# Altium PCB PCB_24V_PWR.PcbDoc
Units mm, origin at the board's own origin, x right, y up, seen from the top; angles counter-clockwise.
Board outline 41 x 35 mm, 2 copper layers (Top Layer, Bottom Layer), stack 1.67 mm thick; 20 components, 38 nets, 78 pads, 25 vias.
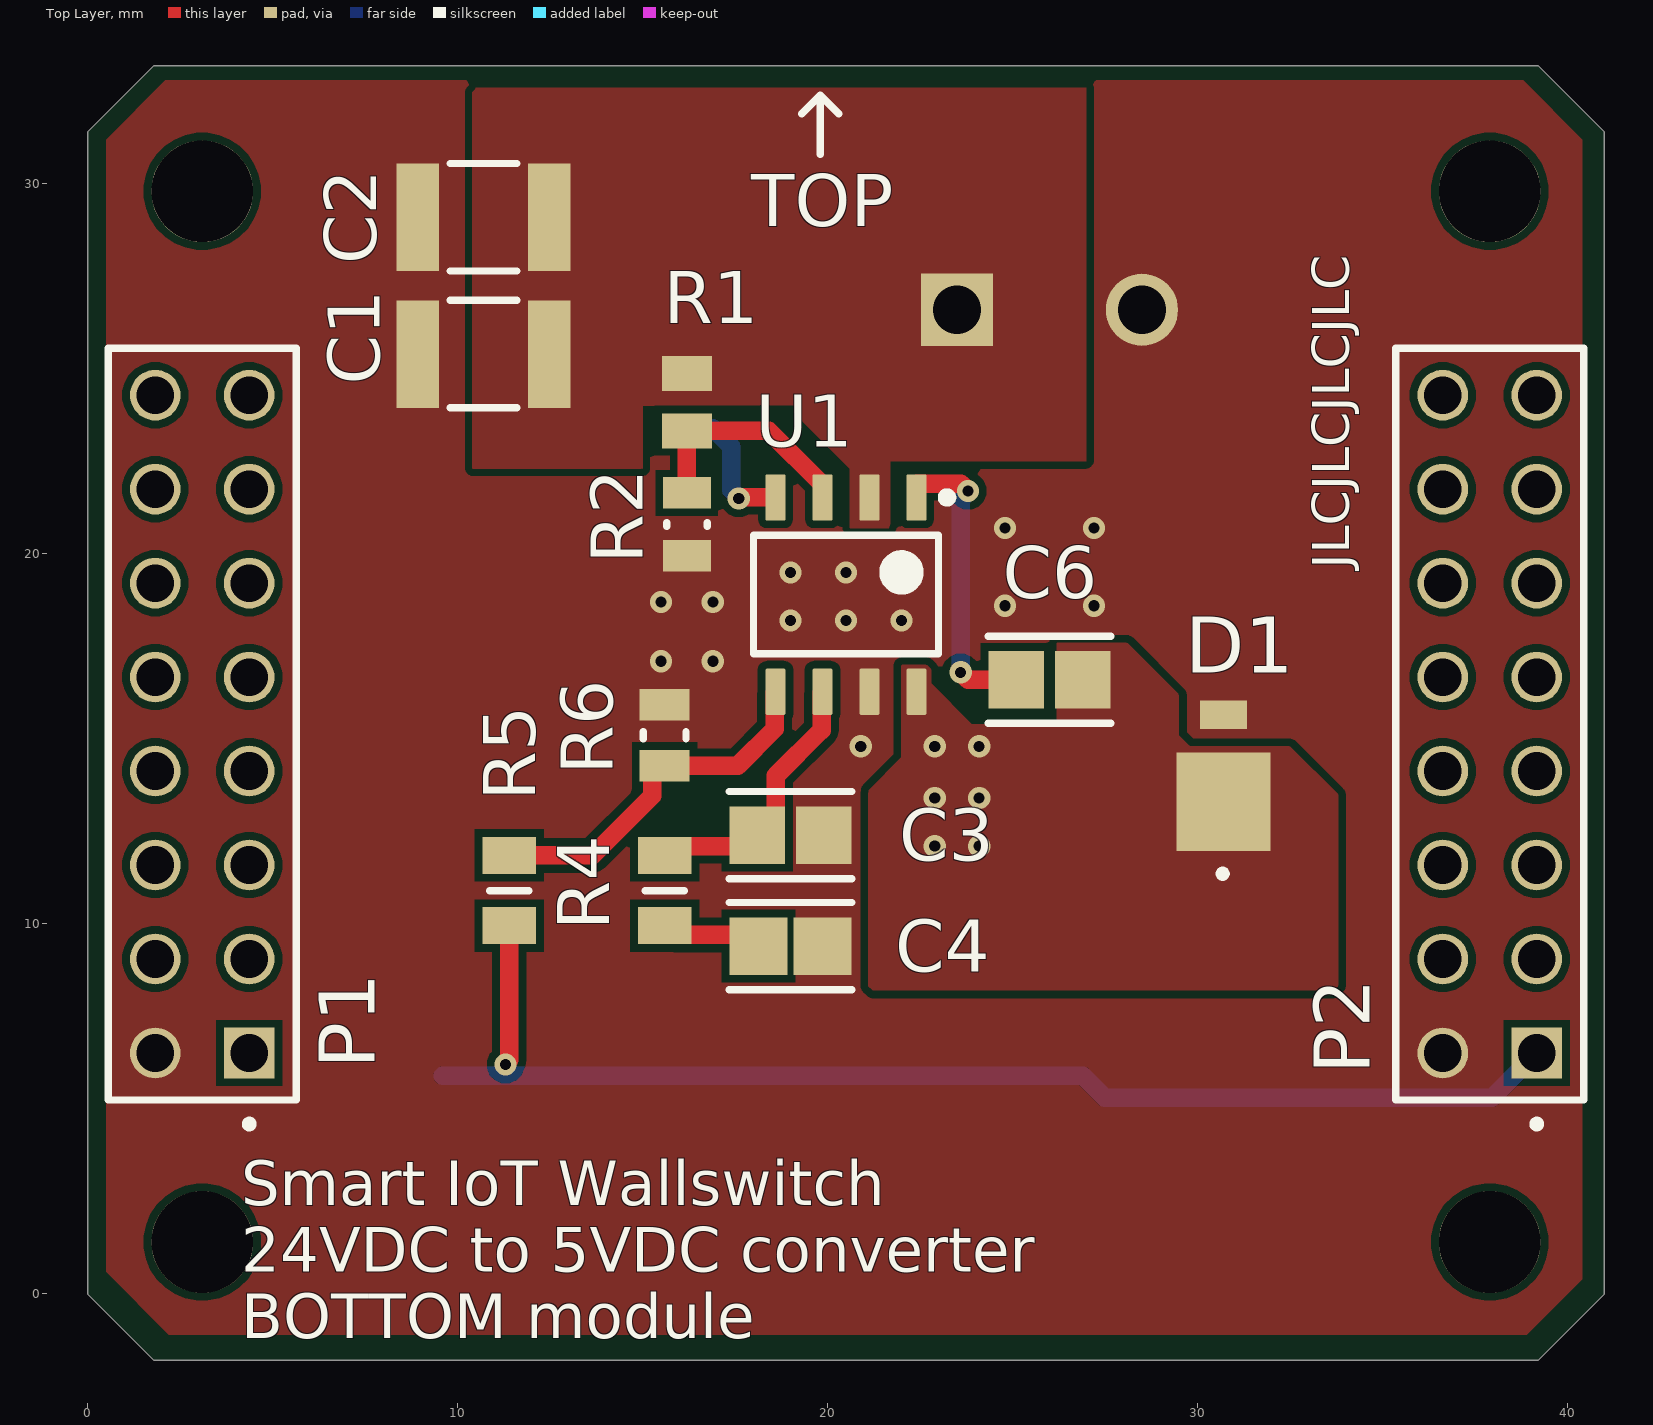
[diagram p0: Top Layer view]
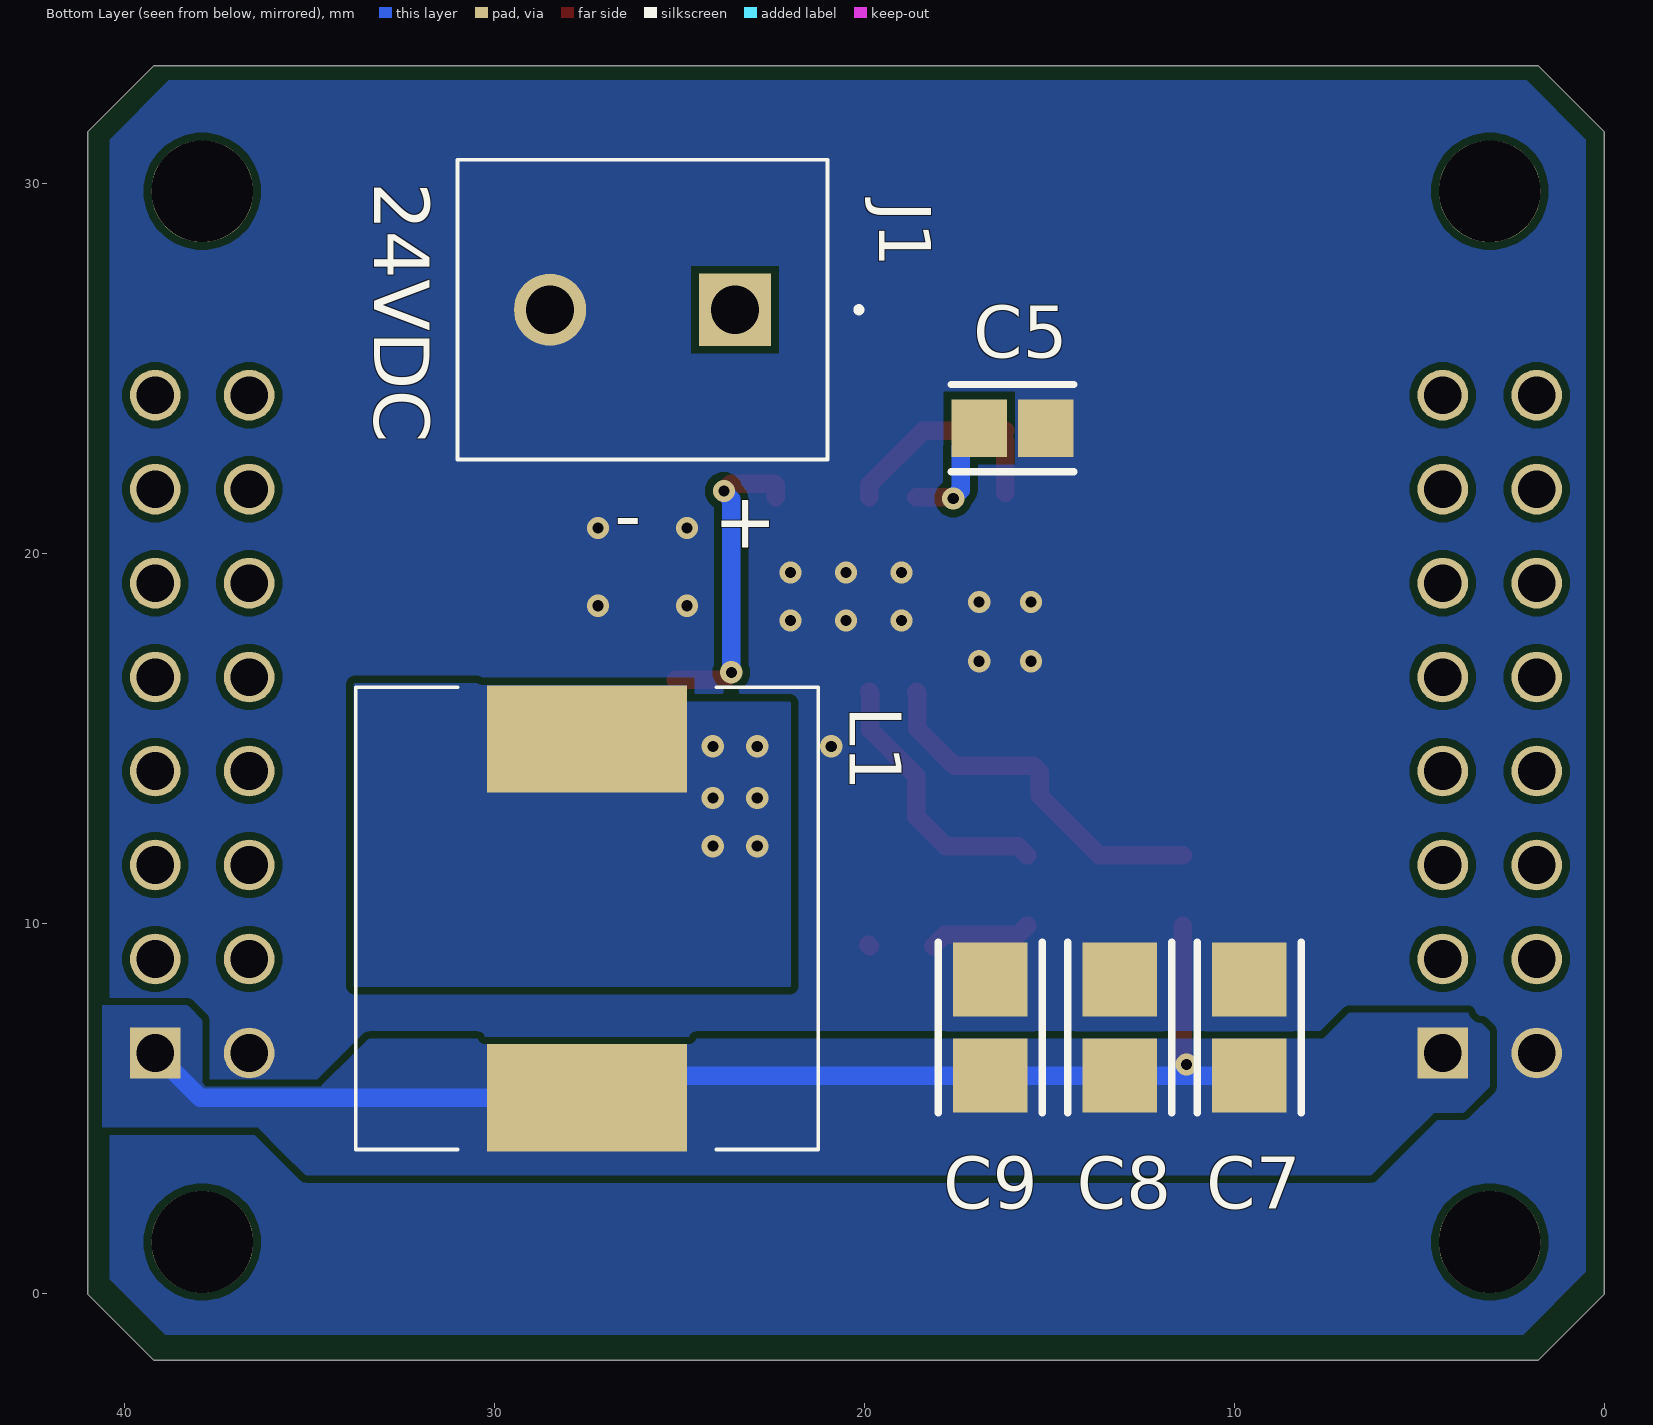
[diagram p1: Bottom Layer view, seen from below]
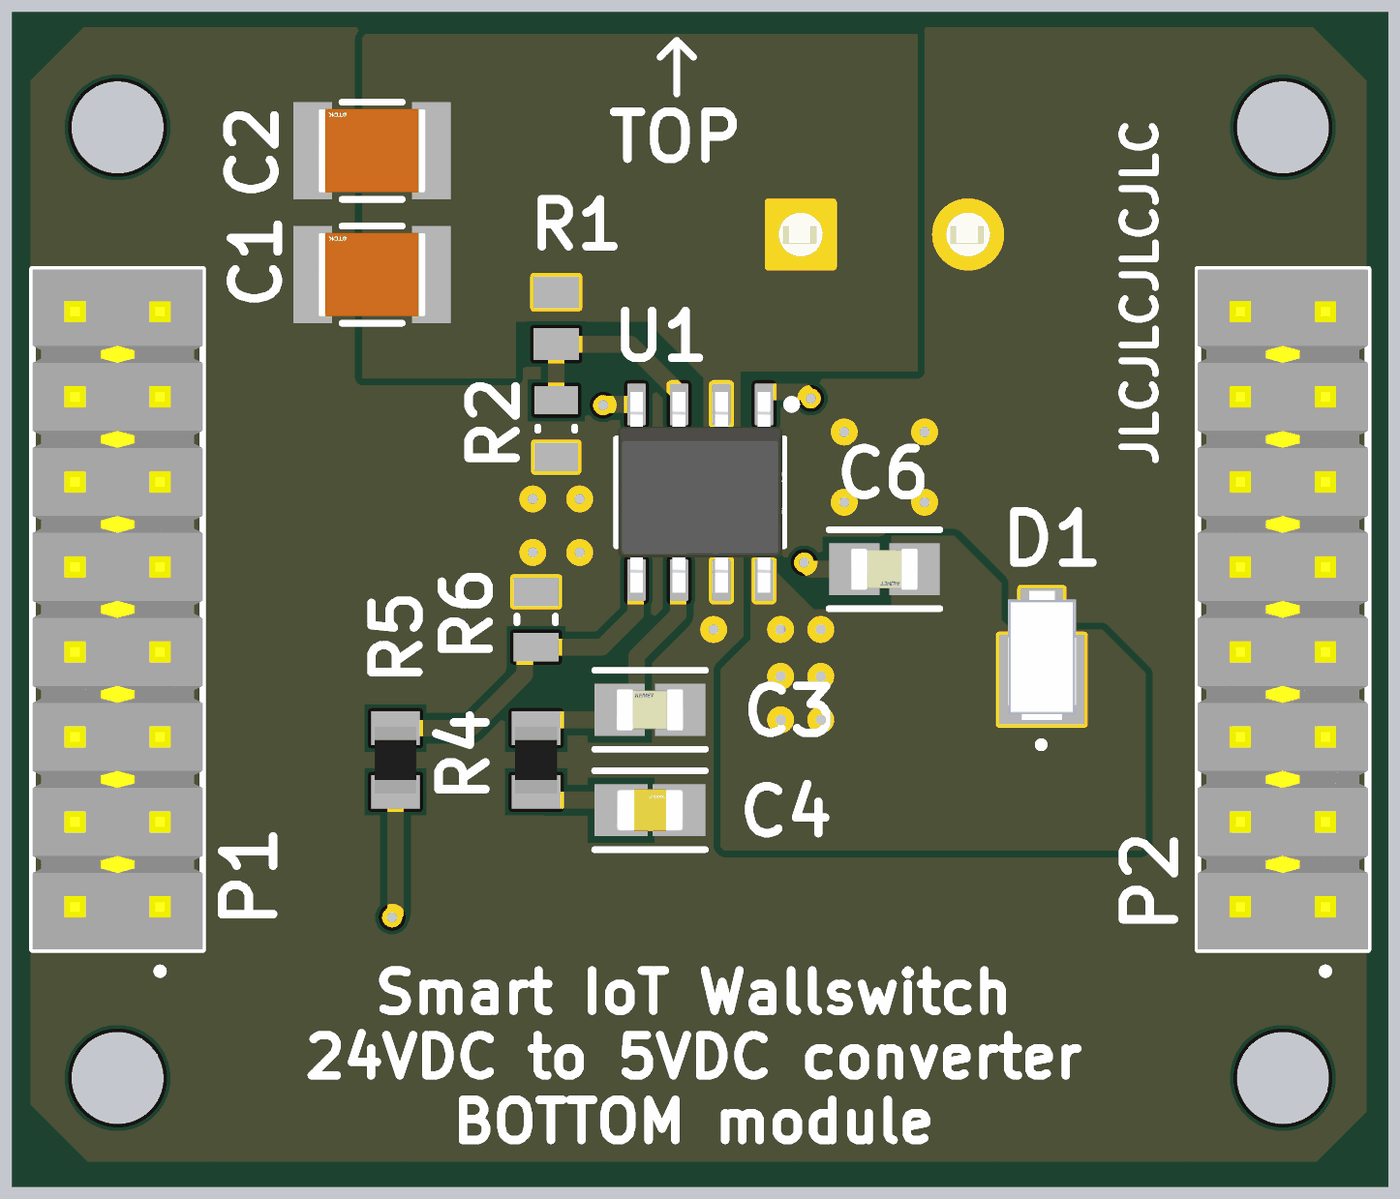
[diagram p2: 3D render of the assembled board from above, using the file's embedded part models]
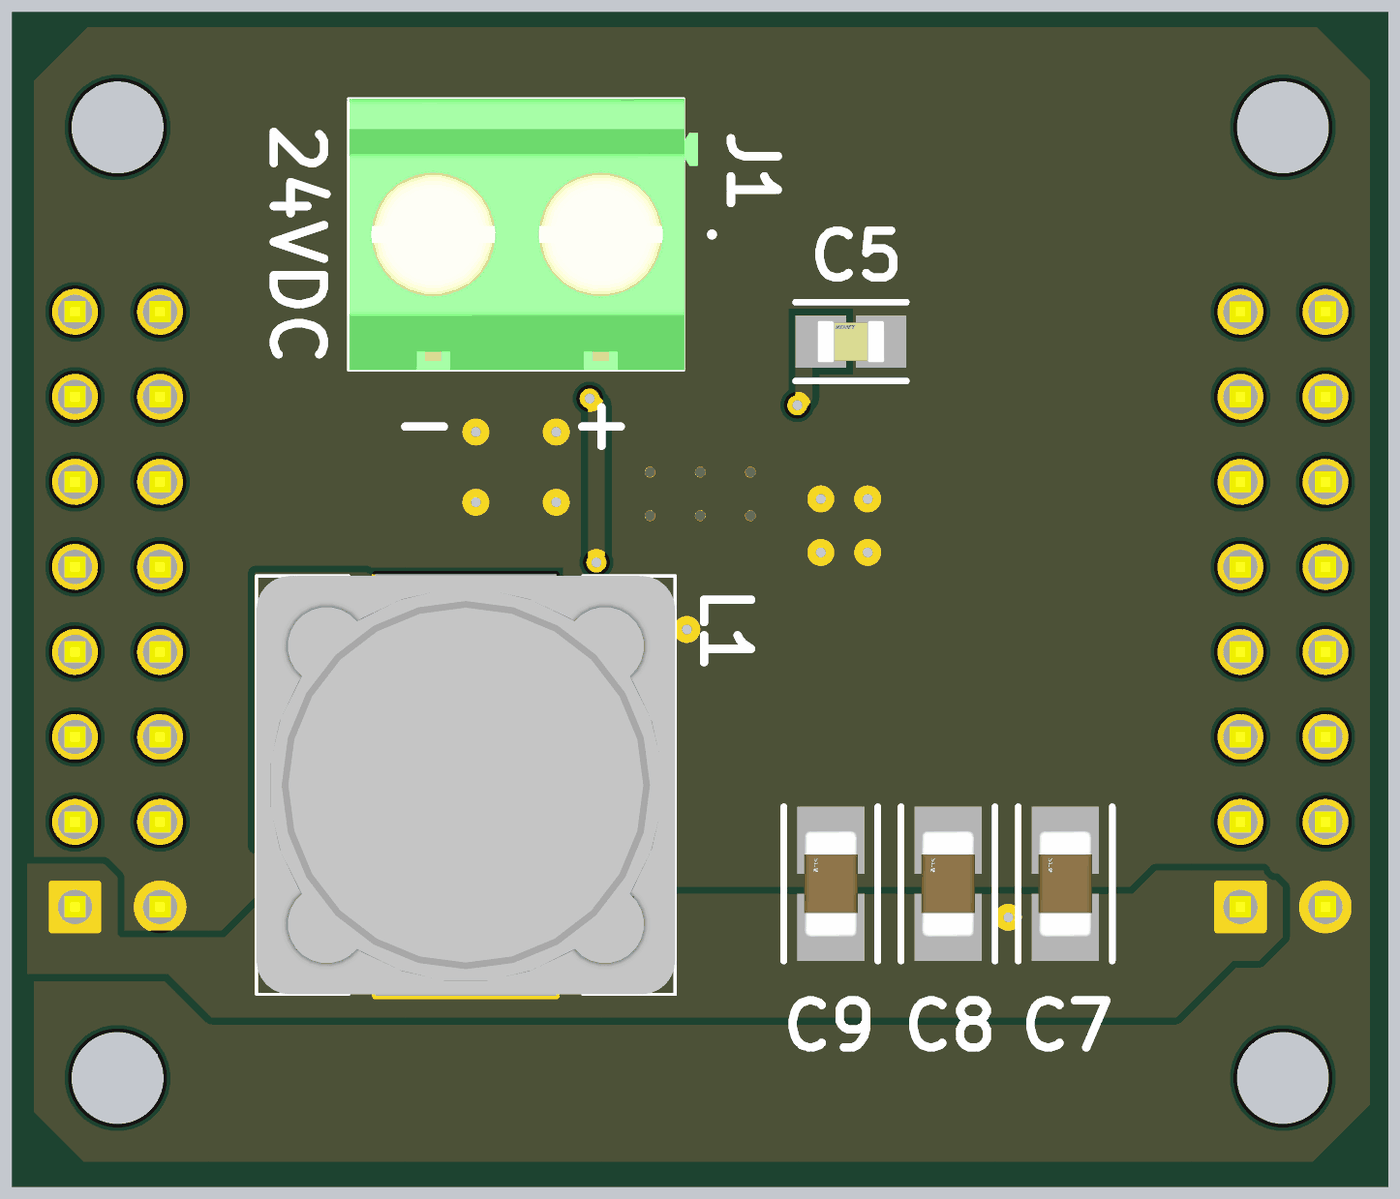
[diagram p3: 3D render of the assembled board from below, using the file's embedded part models]

## Layer stack, top to bottom
Top Solder: solder mask 0.0102, Solder Resist, Dk 3.5
Top Layer: signal copper 0.035
Dielectric 1: dielectric 1.6, FR-4, Dk 4.8
Bottom Layer: signal copper 0.035
Bottom Solder: solder mask 0.0102, Solder Resist, Dk 3.5

## Board outline
1.8,-1.8 0,0 0,31.4 1.8,33.2 39.2,33.2 41,31.4 41,0 39.2,-1.8

## Design rules (kind name [scope] priority, off if disabled: settings)
BoardOutlineClearance [All] p1: gap=0.2 ignorepadtopadclearanceinfootprint=FALSE except(0.4: Arc-SplitBarrior Arc-SplitContinuation Track-SplitBarrior Track-SplitContinuation SMDPad-SplitBarrior SMDPad-SplitContinuation THPad-SplitBarrior THPad-SplitContinuation Via-SplitBarrior Via-SplitContinuation Fill-SplitBarrior Fill-SplitContinuation Poly-SplitBarrior Poly-SplitContinuation Region-SplitBarrior Region-SplitContinuation Text-SplitBarrior Text-SplitContinuation)
Clearance "Clearance Bottom Layer" [OnLayer('Bottom Layer')] p1: gap=0.203 ignorepadtopadclearanceinfootprint=TRUE except(0.254: Arc-Text Track-Text SMDPad-Text THPad-Text Via-Text Fill-Text Poly-Text Region-Text Text-Text)
Clearance "Clearance Top Layer" [OnLayer('Top Layer')] p2: gap=0.203 ignorepadtopadclearanceinfootprint=TRUE except(0.254: Arc-Text Track-Text SMDPad-Text THPad-Text Via-Text Fill-Text Poly-Text Region-Text Text-Text)
Clearance [All] p3: gap=0.2 ignorepadtopadclearanceinfootprint=FALSE except(0.089: Arc-Arc Arc-Track Arc-SMDPad Track-Track Track-SMDPad SMDPad-SMDPad; 0.127: Arc-Via Track-Via SMDPad-Via THPad-Via Via-Via; 0.254: Arc-Text Track-Text SMDPad-Text THPad-Text Via-Text Fill-Text Poly-Text Region-Text Text-Text)
HoleSize [All] p1: absolutevalues=TRUE maxlimit=6.3 minlimit=0.2 maxpercent=80.000 minpercent=20.000
MinimumAnnularRing [All] p1: minimumring=0.076
MinimumSolderMaskSliver [All] p1: minsoldermaskwidth=0.1
PlaneConnect [All] p1: planeconnectstyle=Direct reliefexpansion=0.508 reliefentries=4 reliefconductorwidth=0.254 reliefairgap=0.254
PolygonConnect PolygonConnect_1 [All] p1: connectstyle=Direct reliefconductorwidth=0.508 reliefentries=4 polygonreliefangle="90 Angle" airgapwidth=0.254
RoutingCorners [All] p1: cornerstyle=Round minsetback=2.54 maxsetback=2.54
RoutingVias [All] p1: holewidth=0.5 width=1 viastyle="Through Hole" minholewidth=0.2 minwidth=0.45 maxholewidth=1 maxwidth=2
SilkToSilkClearance [All] p1: silktosilkclearance=0.1
SilkToSolderMaskClearance [IsPad] p1: minsilkscreentomaskgap=0.1 clearancetoexposedcopper=TRUE
SolderMaskExpansion [All] p1: expansion=0.102 istentingtop=FALSE
Width [All] p1: maxlimit=2.54 minlimit=0.089 preferedwidth=0.381
24 further rules are at their usual default settings.

## Components (designator, comment, footprint, x,y, rotation, side; value= is the part's Value field where it differs from the comment)
C1 "C1210C106M5RACTU" FP-C3225-250-0_4-IPC_A 10.7,25.4 r180 top
C2 "C1210C106M5RACTU" FP-C3225-250-0_4-IPC_A 10.7,29.1 r180 top
C3 "C0805C100J5GACTU" FP-C0805C-DN-IPC_A 19,12.4 r0 top
C4 "C2012C0G1H272J060AA" FP-C2012-060-0_2-IPC_A 19,9.4 r0 top
C5 "C0805C822K4RACTU" FP-C0805C-DN-IPC_A 16,23.4 r180 bottom
C6 "C0805C104K8RACTU" FP-C0805C-DN-IPC_A 26,16.6 r180 top
C7 "C3216X5R1A686M160AC" FP-C3216-160-0_3-IPC_A 9.6,7.2 r90 bottom
C8 "C3216X5R1A686M160AC" FP-C3216-160-0_3-IPC_A 13.1,7.2 r90 bottom
C9 "C3216X5R1A686M160AC" FP-C3216-160-0_3-IPC_A 16.6,7.2 r90 bottom
D1 "SS2PH10-M3/84A" DO-220AA 30.7,13.999 r90 top
J1 "1729018" 1729018 23.5,26.6 r0 bottom
L1 "SRR1260-470M" SRR1260470M 27.5,10.15 r180 bottom
P1 "TSW-108-07-T-D" SAMTEC_TSW-108-07-T-D 3.1,15.4 r90 top
P2 "TSW-108-07-T-D" SAMTEC_TSW-108-07-T-D 37.9,15.4 r90 top
R1 "ERJ-6ENF1693V" RESC2013X70X40LL20T20 16.2,24.1 r270 top
R2 "CR0805-FX-3572ELF" RESC0805(2012)_L 16.2,20.8 r270 top
R4 "CR0805-FX-2212ELF" RESC2012X60N 15.6,10.9 r270 top
R5 "CR0805-FX-1022ELF" RESC2012X60N 11.4,10.9 r90 top
R6 "CRCW08051K96FKEA" RESC2013X50X30LL20T20 15.6,15.1 r90 top
U1 "TPS54233D" D0008A_L 20.5,18.9 r270 top

## Footprints (in the part's own frame and the unit in brackets; to place one, negate y for a bottom-side part, rotate by r counter-clockwise, add the part's x,y. Pads: shape width x height; smd on the part's side, far side on the other; paste and mask are expansions set on the pad)
1729018 [mm]
  rect 1.95x1.95 hole 1.3: 1(0,0)
  round 1.95 hole 1.3: 2(5,0)
  silkscreen extent -3.4,-4.05 7.5,4.05, body extent -2.93,-4.05 7.47,4.05, height 10.82
D0008A_L [mm] "SOIC, 8-Leads, Body 5x4mm, Pitch 1.27mm, IPC High Density"
  rrect18% 1.25x0.55 smd: 1(-2.625,1.905) 2(-2.625,0.635) 3(-2.625,-0.635) 4(-2.625,-1.905) 5(2.625,-1.905) 6(2.625,-0.635) 7(2.625,0.635) 8(2.625,1.905)
  silkscreen extent -2.75,-2.5 1.6,2.86, body extent -3,-2.45 3,2.45, height 1.63
DO-220AA [mil]
  rect 105.12x100 smd: 1(-27.5,0)
  rect 30x50 smd: 2(65.06,0)
  silkscreen extent -107,-2 -102,3, body extent -75,-40 77,40, height 39
FP-C0805C-DN-IPC_A [mm]
  rect 1.505x1.556 smd paste+0 mask+0: 1(-0.901,0) 2(0.901,0)
  silkscreen extent -1.65,-1.18 1.65,1.18, body extent -2.15,-1.28 2.15,1.28, height 0.25
FP-C2012-060-0_2-IPC_A [mm]
  rect 1.578x1.556 smd paste+0 mask+0: 1(-0.864,0) 2(0.864,0)
  silkscreen extent -1.65,-1.18 1.65,1.18, body extent -2.15,-1.28 2.15,1.28, height 0.25
FP-C3216-160-0_3-IPC_A [mm]
  rect 2.004x2.006 smd paste+0 mask+0: 1(-1.301,0) 2(1.301,0)
  silkscreen extent -2.3,-1.4 2.3,1.4, body extent -1.6,-0.8 1.6,0.8, height 1.9
FP-C3225-250-0_4-IPC_A [mm]
  rect 1.153x2.904 smd paste+0 mask+0: 1(-1.775,0) 2(1.775,0)
  silkscreen extent -0.9,-1.45 0.9,1.45, body extent -1.6,-1.25 1.6,1.25, height 2.8
RESC0805(2012)_L [mm] "Chip Resistor, Body 2.0x1.3mm, IPC High Density"
  rect 0.85x1.3 smd: 1(-0.85,0) 2(0.85,0)
  silkscreen extent -0.05,-0.55 0.05,0.55, body extent -1.1,-0.67 1.1,0.68, height 0.7
RESC2012X60N [mm]
  rect 1x1.45 smd: 1(-0.95,0) 2(0.95,0)
  silkscreen extent 0,-0.53 0,0.53, body extent -1,-0.63 1,0.63, height 0.5
RESC2013X50X30LL20T20 [mm] "Chip Resistor, 2-Leads, Body 2.00x1.25mm, IPC High Density"
  rect 0.85x1.35 smd: 1(-0.825,0) 2(0.825,0)
  silkscreen extent -0.1,-0.58 0.1,0.58, body extent -1.1,-0.72 1.1,0.72, height 0.5
RESC2013X70X40LL20T20 [mm] "Chip Resistor, 2-Leads, Body 2.00x1.25mm, IPC High Density"
  rect 0.95x1.35 smd: 1(-0.775,0) 2(0.775,0)
  body extent -1.1,-0.72 1.1,0.72, height 0.7
SAMTEC_TSW-108-07-T-D [mm]
  rect 1.37x1.37 hole 1.02: 01(-8.89,-1.27)
  round 1.37 hole 1.02: 02(-8.89,1.27) 03(-6.35,-1.27) 04(-6.35,1.27) 05(-3.81,-1.27) 06(-3.81,1.27) 07(-1.27,-1.27) 08(-1.27,1.27) 09(1.27,-1.27) 10(1.27,1.27) 11(3.81,-1.27) 12(3.81,1.27) 13(6.35,-1.27) 14(6.35,1.27) 15(8.89,-1.27) 16(8.89,1.27)
  silkscreen extent -10.91,-2.54 10.16,2.54, body extent -10.16,-2.54 10.16,2.54, height 8.38
SRR1260470M [mm]
  rect 5.4x2.9 smd: 1(0,4.85) 2(0,-4.85)
  silkscreen extent -6.25,-6.25 6.25,6.25, body extent -6.25,-6.25 6.25,6.25, height 6

## Part data
C1 C2: "3225 C 10uF Ceramic Multilayer Capacitor; 50 V; +85degC; X7R Dielectric; +/-20%", Capacitance=10uF, Case Code (Imperial)=1210, Case Code (Metric)=3225, Dielectric=X7R, Dielectric Material=Ceramic, Manufacturer=KEMET, Max Operating Temperature=125°C, Min Operating Temperature=-55°C, Package Quantity=1000, Supplier Part Number 1=80-C1210C106M5R, Tolerance=20%, Voltage=50V, Case/Package=1210, Category="Ceramic Capacitors", ComponentLink1Description=http://www.farnell.com/datasheets/2746479.pdf?src-supplier=Farnell, ComponentLink1URL=http://www.farnell.com/datasheets/2746479.pdf?src-supplier=Farnell, ComponentLink2Description=http://uk.rs-online.com/webdocs/1515/0900766b8151523a.pdf?src-supplier=RSComponents, ComponentLink2URL=http://uk.rs-online.com/webdocs/1515/0900766b8151523a.pdf?src-supplier=RSComponents, ComponentLink3Description=http://www.farnell.com/datasheets/2323917.pdf?src-supplier=Farnell, ComponentLink3URL=http://www.farnell.com/datasheets/2323917.pdf?src-supplier=Farnell, ComponentLink4Description=http://www.mouser.com/ds/2/212/KEM_C1002_X7R_SMD-357932.pdf?src-supplier=Mouser, ComponentLink4URL=http://www.mouser.com/ds/2/212/KEM_C1002_X7R_SMD-357932.pdf?src-supplier=Mouser, ComponentLink5Description=http://www.kemet.com/Lists/ProductCatalog/Attachments/53/KEM_C1002_X7R_SMD.pdf?src-supplier=Digi-Key, ComponentLink5URL=http://www.kemet.com/Lists/ProductCatalog/Attachments/53/KEM_C1002_X7R_SMD.pdf?src-supplier=Digi-Key, ComponentLink6Description=http://www.farnell.com/datasheets/2746479.pdf?src-supplier=Newark, ComponentLink6URL=http://www.farnell.com/datasheets/2746479.pdf?src-supplier=Newark, ComponentLink7Description=https://api.kemet.com/component-edge/download/datasheet/C1210C106M5RACTU.pdf?src-supplier=Digi-Key, ComponentLink7URL=https://api.kemet.com/component-edge/download/datasheet/C1210C106M5RACTU.pdf?src-supplier=Digi-Key, Depth=2.5mm, Height=2.5mm, Length=3.2mm, Manufacturer Part Number=C1210C106M5RACTU, Mount="Surface Mount", Packaging="Tape and Reel", Pricing 1="1=1,11000, 10=0,85000, 50=0,85000, 100=0,60800, 500=0,54200, 1000=0,47500, 10000=0,47500 (USD)", RoHS=Yes, RoHS Compliant=Yes, Stock 1=269, Supplier 1=Mouser, Termination=SMD/SMT, Thickness=0.11inch, Voltage Rating=50V, Voltage Rating (DC)=50V, Weight=0.000564oz, Width=0.098inch
C3: "Cap Ceramic 10pF 50V C0G 5% SMD 0805 125C Plastic T/R", Capacitance=10pF, Case Code (Imperial)=0805, Case Code (Metric)=2012, Dielectric=C0G, Dielectric Material=Ceramic, Manufacturer=KEMET, Max Operating Temperature=125°C, Min Operating Temperature=-55°C, Package Quantity=4000, Supplier Part Number 1=80-C0805C100J5G, Temperature Coefficient=30ppm/°C, Tolerance=5%, Voltage=50V, Case/Package=0805, Category="Ceramic Capacitors", ComponentLink1Description=https://datasheet.ciiva.com/6177/kem-c1003-c0g-smd-6177333.pdf?src-supplier=Farnell, ComponentLink1URL=https://datasheet.ciiva.com/6177/kem-c1003-c0g-smd-6177333.pdf?src-supplier=Farnell, ComponentLink2Description=https://datasheet.ciiva.com/14609/70095383-14609227.pdf?src-supplier=Allied+Electronics, ComponentLink2URL=https://datasheet.ciiva.com/14609/70095383-14609227.pdf?src-supplier=Allied+Electronics, ComponentLink3Description=https://datasheet.ciiva.com/5423/kem-c1003-c0g-smd-356956-5423483.pdf?src-supplier=Mouser, ComponentLink3URL=https://datasheet.ciiva.com/5423/kem-c1003-c0g-smd-356956-5423483.pdf?src-supplier=Mouser, ComponentLink4Description=https://datasheet.ciiva.com/2988/kem-c1003-c0g-smd-2988556.pdf?src-supplier=Avnet, ComponentLink4URL=https://datasheet.ciiva.com/2988/kem-c1003-c0g-smd-2988556.pdf?src-supplier=Avnet, Construction=Flat, Contact Material=Tin, Contact Plating=Tin,Matte, Depth=1.25mm, Dissipation Factor=0.1%, Height=0.78mm, Lead Free="Lead Free", Lead Pitch=0.75mm, Length=2mm, Manufacturer Part Number=C0805C100J5GACTU, Mount="PCB,Surface Mount", Number of Pins=2, Packaging="Tape and Reel", Pricing 1="1=0,12000, 10=0,04800, 50=0,04800, 100=0,03200, 500=0,02300, 1000=0,01900, 4000=0,01800, 8000=0,01500, 10000=0,01500 (USD)", Radiation Hardening=No, REACH SVHC="No SVHC", RoHS=Yes, RoHS Compliant=Yes, Series=C0805C, Stock 1=194709, Supplier 1=Mouser, Termination=SMD/SMT, Thickness=0.035inch, Voltage Rating=50V, Voltage Rating (DC)=50V, Width=1.2mm
C4: "Cap Ceramic 0.0027uF 50V C0G 5% SMD 0805 125C Paper T/R", Capacitance=2.7nF, Case Code (Imperial)=0805, Case Code (Metric)=2012, Dielectric=C0G, Dielectric Material=Ceramic, Manufacturer=TDK, Max Operating Temperature=125°C, Min Operating Temperature=-55°C, Package Quantity=1, Supplier Part Number 1=810-C2012C0G1H272J-1, Temperature Coefficient=30ppm/°C, Tolerance=5%, Voltage=50V, Case/Package=0805, Category="Ceramic Capacitors", ComponentLink1Description=https://datasheet.ciiva.com/24219/c2012c0g1h272j060aa-264945-24219106.pdf?src-supplier=Mouser, ComponentLink1URL=https://datasheet.ciiva.com/24219/c2012c0g1h272j060aa-264945-24219106.pdf?src-supplier=Mouser, ComponentLink2Description=https://datasheet.ciiva.com/11788/0900766b80c1bb00-11788104.pdf?src-supplier=RSComponents, ComponentLink2URL=https://datasheet.ciiva.com/11788/0900766b80c1bb00-11788104.pdf?src-supplier=RSComponents, ComponentLink3Description=https://datasheet.ciiva.com/26936/getdatasheetpartid-781773-26936472.pdf?src-supplier=Verical, ComponentLink3URL=https://datasheet.ciiva.com/26936/getdatasheetpartid-781773-26936472.pdf?src-supplier=Verical, ComponentLink4Description=https://datasheet.ciiva.com/6291/tdkmlcccaprange-6291707.pdf?src-supplier=Digi-Key, ComponentLink4URL=https://datasheet.ciiva.com/6291/tdkmlcccaprange-6291707.pdf?src-supplier=Digi-Key, ComponentLink5Description=https://datasheet.ciiva.com/6291/tdkmlcccaprange-6291704.pdf?src-supplier=Digi-Key, ComponentLink5URL=https://datasheet.ciiva.com/6291/tdkmlcccaprange-6291704.pdf?src-supplier=Digi-Key, ComponentLink6Description=https://datasheet.ciiva.com/6291/tdkmlcccaprange-6291710.pdf?src-supplier=Digi-Key, ComponentLink6URL=https://datasheet.ciiva.com/6291/tdkmlcccaprange-6291710.pdf?src-supplier=Digi-Key, Construction=Flat, Depth=1.25mm, Height=0.6mm, Lead Free="Lead Free", Length=2mm, Manufacturer Part Number=C2012C0G1H272J060AA, Mount="Surface Mount", Packaging="Tape and Reel", Pricing 1="1=0,21000, 10=0,14700, 50=0,14700, 100=0,07000, 500=0,04900, 1000=0,04100, 2000=0,03800, 4000=0,03400, 8000=0,03100, 10000=0,03100 (USD)", Radiation Hardening=No, RoHS=Yes, RoHS Compliant=Yes, Series=C, Stock 1=7246, Supplier 1=Mouser, Termination=SMD/SMT, Thickness=0.028inch, Voltage Rating=50V, Voltage Rating (DC)=50V, Weight=0.000194oz, Width=1.25mm
C5: "Capacitor, Ceramic, 8.2nF, 16VDC, 10-% Tol, 10+% Tol, X7R-TC Code, -15, 15%-TC RoHS Compliant: Yes", Capacitance=8.2nF, Case Code (Imperial)=0805, Case Code (Metric)=2012, Dielectric=X7R, Dielectric Material=Ceramic, Manufacturer=KEMET, Max Operating Temperature=125°C, Min Operating Temperature=-55°C, Package Quantity=4000, Supplier Part Number 1=80-C0805C822K4R, Tolerance=10%, Voltage Rating=16V, Case/Package=0805, Category="Ceramic Capacitors", ComponentLink1Description=http://www.mouser.com/ds/2/212/KEM_C1002_X7R_SMD-1102033.pdf?src-supplier=Mouser, ComponentLink1URL=http://www.mouser.com/ds/2/212/KEM_C1002_X7R_SMD-1102033.pdf?src-supplier=Mouser, ComponentLink2Description=http://components.arrow.com/part/dataview/3450560S8615350N7429?src-supplier=Arrow+Electronics, ComponentLink2URL=http://components.arrow.com/part/dataview/3450560S8615350N7429?src-supplier=Arrow+Electronics, ComponentLink3Description=https://search.kemet.com/component-edge/download/datasheet/C0805C822K4RACTU.pdf?src-supplier=Digi-Key, ComponentLink3URL=https://search.kemet.com/component-edge/download/datasheet/C0805C822K4RACTU.pdf?src-supplier=Digi-Key, Depth=1.25mm, Dissipation Factor=5%, Height=0.78mm, Lead Pitch=0.75mm, Length=2mm, Manufacturer Part Number=C0805C822K4RACTU, Mount="Surface Mount", Packaging="Tape and Reel", Pricing 1="1=0,31000, 10=0,21500, 50=0,21500, 100=0,12200, 1000=0,07500, 10000=0,06600 (USD)", RoHS=Yes, RoHS Compliant=Yes, Series=C, Stock 1=3964, Supplier 1=Mouser, Termination=SMD/SMT, Thickness=0.035inch, Voltage Rating (DC)=16V, Width=0.049inch
C6: "Cap Ceramic 0.1uF 10V X7R 10% SMD 0805 125°C Paper T/R", Capacitance=100nF, Case Code (Imperial)=0805, Case Code (Metric)=2012, Dielectric=X7R, Dielectric Material=Ceramic, Manufacturer=KEMET, Max Operating Temperature=125°C, Min Operating Temperature=-55°C, Package Quantity=1, Supplier Part Number 1=80-C0805C104K8R, Tolerance=10%, Voltage Rating=10V, Case/Package=0805, Category="Ceramic Capacitors", ComponentLink1Description=http://components.arrow.com/part/dataview/2091095S5871853N7429?src-supplier=Arrow+Electronics, ComponentLink1URL=http://components.arrow.com/part/dataview/2091095S5871853N7429?src-supplier=Arrow+Electronics, ComponentLink2Description=http://www.farnell.com/datasheets/2323363.pdf?src-supplier=Farnell, ComponentLink2URL=http://www.farnell.com/datasheets/2323363.pdf?src-supplier=Farnell, ComponentLink3Description=http://www.mouser.com/ds/2/212/KEM_C1002_X7R_SMD-1102033.pdf?src-supplier=Mouser, ComponentLink3URL=http://www.mouser.com/ds/2/212/KEM_C1002_X7R_SMD-1102033.pdf?src-supplier=Mouser, ComponentLink4Description=http://www.farnell.com/datasheets/2746328.pdf?src-supplier=Farnell, ComponentLink4URL=http://www.farnell.com/datasheets/2746328.pdf?src-supplier=Farnell, ComponentLink5Description=http://www.farnell.com/datasheets/2746328.pdf?src-supplier=Newark, ComponentLink5URL=http://www.farnell.com/datasheets/2746328.pdf?src-supplier=Newark, ComponentLink6Description=https://api.kemet.com/component-edge/download/datasheet/C0805C104K8RACTU.pdf?src-supplier=Digi-Key, ComponentLink6URL=https://api.kemet.com/component-edge/download/datasheet/C0805C104K8RACTU.pdf?src-supplier=Digi-Key, Depth=1.25mm, Dissipation Factor=5%, Height=0.9mm, Lead Pitch=0.75mm, Length=2mm, Manufacturer Part Number=C0805C104K8RACTU, Mount="Surface Mount", Packaging="Tape and Reel", Pricing 1="1=0,18000, 10=0,08600, 50=0,08600, 100=0,08600, 1000=0,08600, 10000=0,08500 (USD)", REACH SVHC="No SVHC", RoHS=Yes, RoHS Compliant=Yes, Series=C, Stock 1=26277, Supplier 1=Mouser, Termination=SMD/SMT, Thickness=0.035inch, Voltage Rating (DC)=10V, Width=1.2mm
C7 C8 C9: "C Series 1206 68 uF 10 V ±20 % Tolerance X5R SMT Multilayer Ceramic Capacitor", Capacitance=68uF, Case Code (Imperial)=1206, Case Code (Metric)=3216, Dielectric=X5R, Dielectric Material=Ceramic, Manufacturer=TDK, Max Operating Temperature=85°C, Min Operating Temperature=-55°C, Package Quantity=2000, Supplier Part Number 1=810-C3216X5R1A686M1C, Tolerance=20%, Voltage Rating=10V, Case/Package=1206, Category="Ceramic Capacitors", ComponentLink1Description=http://www.mouser.com/ds/2/400/tdk_mlcc_commercial_general_en-542463.pdf?src-supplier=Mouser, ComponentLink1URL=http://www.mouser.com/ds/2/400/tdk_mlcc_commercial_general_en-542463.pdf?src-supplier=Mouser, ComponentLink2Description=http://www.farnell.com/datasheets/2792994.pdf?src-supplier=Farnell, ComponentLink2URL=http://www.farnell.com/datasheets/2792994.pdf?src-supplier=Farnell, ComponentLink3Description=https://product.tdk.com/info/en/documents/chara_sheet/C3216X5R1A686M160AC.pdf?src-supplier=Digi-Key, ComponentLink3URL=https://product.tdk.com/info/en/documents/chara_sheet/C3216X5R1A686M160AC.pdf?src-supplier=Digi-Key, ComponentLink4Description=http://www.farnell.com/datasheets/2370676.pdf?src-supplier=Newark, ComponentLink4URL=http://www.farnell.com/datasheets/2370676.pdf?src-supplier=Newark, ComponentLink5Description=https://product.tdk.com/en/products/common/pdf/mlcc_partnumber_description.pdf?src-supplier=Digi-Key, ComponentLink5URL=https://product.tdk.com/en/products/common/pdf/mlcc_partnumber_description.pdf?src-supplier=Digi-Key, ComponentLink6Description=http://product.tdk.com/en/catalog/datasheets/mlcc_commercial_general_en.pdf?src-supplier=Avnet, ComponentLink6URL=http://product.tdk.com/en/catalog/datasheets/mlcc_commercial_general_en.pdf?src-supplier=Avnet, Height=1.6mm, Lead Free="Lead Free", Length=0.126inch, Manufacturer Part Number=C3216X5R1A686M160AC, Mount="Surface Mount", Packaging="Tape and Reel", Pricing 1="1=1,39000, 10=0,98700, 50=0,98700, 100=0,84800, 500=0,64600, 1000=0,57000, 2000=0,53100, 4000=0,51500, 10000=0,49900, 24000=0,48400 (USD)", Resistor Type=Ceramic, RoHS=Yes, RoHS Compliant=Yes, Series=C, Stock 1=21577, Supplier 1=Mouser, Termination=SMD/SMT, Thickness=0.071inch, Voltage Rating (DC)=10V, Width=1.6mm
D1: "DIODE SCHOTTKY 100V 2A DO220AA", Average Rectified Current=2A, Case/Package=DO-220AA, Forward Voltage=800mV, Manufacturer=Vishay, Max Forward Surge Current (Ifsm)=50A, Max Operating Temperature=175°C, Max Repetitive Reverse Voltage (Vrrm)=100V, Max Reverse Current=1uA, Min Operating Temperature=-55°C, Package Quantity=1, Supplier Part Number 1=625-SS2PH10-M3, Category="Rectifier Diodes", ComponentLink1Description=https://datasheet.ciiva.com/18567/ss2ph920&20ss2ph10-18567489.pdf?src-supplier=Digi-Key, ComponentLink1URL=https://datasheet.ciiva.com/18567/ss2ph920&20ss2ph10-18567489.pdf?src-supplier=Digi-Key, ComponentLink2Description=https://datasheet.ciiva.com/7962/ss2ph9-7962425.pdf?src-supplier=Element14, ComponentLink2URL=https://datasheet.ciiva.com/7962/ss2ph9-7962425.pdf?src-supplier=Element14, ComponentLink3Description=https://datasheet.ciiva.com/22695/1911775-22695932.pdf?src-supplier=Element14, ComponentLink3URL=https://datasheet.ciiva.com/22695/1911775-22695932.pdf?src-supplier=Element14, ComponentLink4Description=https://datasheet.ciiva.com/8289/ss2ph9-8289129.pdf?src-supplier=Avnet, ComponentLink4URL=https://datasheet.ciiva.com/8289/ss2ph9-8289129.pdf?src-supplier=Avnet, ComponentLink5Description=https://datasheet.ciiva.com/13948/ss2ph9-13948536.pdf?src-supplier=Digi-Key, ComponentLink5URL=https://datasheet.ciiva.com/13948/ss2ph9-13948536.pdf?src-supplier=Digi-Key, ComponentLink6Description=https://datasheet.ciiva.com/15045/ss2ph9ss2ph10-15045638.pdf?src-supplier=Digi-Key, ComponentLink6URL=https://datasheet.ciiva.com/15045/ss2ph9ss2ph10-15045638.pdf?src-supplier=Digi-Key, Contact Plating=Tin,Matte, Element Configuration=Single, Forward Current=2A, Lead Free="Lead Free", Manufacturer Part Number=SS2PH10-M3/84A, Max Reverse Voltage (DC)=100V, Max Surge Current=50A, Mount="Surface Mount", Number of Pins=2, Packaging="Tape and Reel", Peak Non-Repetitive Surge Current=50A, Pricing 1="1=0,48000, 10=0,39800, 50=0,39800, 100=0,27100, 1000=0,15300, 10000=0,13900 (USD)", Radiation Hardening=No, REACH SVHC=Unknown, RoHS=Yes, RoHS Compliant=Yes, Series=eSMP®, Stock 1=5780, Supplier 1=Mouser
J1: "间距5mm 2pin 10A 300V 可拼接 螺钉式 直插", Color=Green, Current=10A, Current Rating=13.5A, Flammability Rating="UL94 V-0", Manufacturer="Phoenix Contact", Max Supply Voltage=250V, Package Quantity=50, Supplier Part Number 1=651-1729018, Voltage=300V, Voltage Rating=400V, Approvals=UL,CSA,cULus,CB,EAC, Category="Terminal Blocks", ComponentLink1Description=https://datasheet.ciiva.com/16071/1729018-16071814.pdf?src-supplier=Onlinecomponents.com, ComponentLink1URL=https://datasheet.ciiva.com/16071/1729018-16071814.pdf?src-supplier=Onlinecomponents.com, ComponentLink2Description=https://datasheet.ciiva.com/15169/getdatasheetpartid-177860-15169643.pdf?src-supplier=Verical, ComponentLink2URL=https://datasheet.ciiva.com/15169/getdatasheetpartid-177860-15169643.pdf?src-supplier=Verical, ComponentLink3Description=https://datasheet.ciiva.com/832/1729018-832055.pdf?src-supplier=Digi-Key, ComponentLink3URL=https://datasheet.ciiva.com/832/1729018-832055.pdf?src-supplier=Digi-Key, ComponentLink4Description=https://datasheet.ciiva.com/14607/70054375-14607356.pdf?src-supplier=Allied+Electronics, ComponentLink4URL=https://datasheet.ciiva.com/14607/70054375-14607356.pdf?src-supplier=Allied+Electronics, ComponentLink5Description=https://datasheet.ciiva.com/33105/1729018-33105978.pdf?src-supplier=Today+Components, ComponentLink5URL=https://datasheet.ciiva.com/33105/1729018-33105978.pdf?src-supplier=Today+Components, Connector Type=Screw, Contact Material=Tin, Depth=8.1mm, Gender=Male, Height=13.5mm, Housing Color=Green, Housing Material=Polyamide, Insulation Material=Nylon, Lead Free="Lead Free", Length=8.1mm, Manufacturer Part Number=1729018, Material=Polyamide, Max Current Rating=13.5A, Mount="Through Hole", Number of Circuits=2, Number of Contacts=2, Number of Levels=1, Number of Pins=2, Number of Poles=2, Number of Positions=2, Number of Positions Per Level=2, Number of Rows=1, Orientation=Straight, Packaging=Bulk, Pitch=5mm, Pricing 1="1=1,21000, 10=1,17000, 50=1,12000, 100=1,08000, 250=1,01000, 500=0,92900, 1000=0,85800, 2500=0,81800, 5000=0,76700, 10000=0,76700 (USD)", Radiation Hardening=No, REACH SVHC=Unknown, RoHS=Yes, RoHS Compliant=Yes, Series="COMBICON MKDSN", Stock 1=15002, Stripping Length=6mm, Supplier 1=Mouser, Termination=Screw, Weight=0.06949oz, Width=13.5mm, Wire Gauge (Max)=26AWG, Wire Gauge (Min)=26AWG, Wire/Cable Gauge=26AWG
L1: "Inductor Power Shielded Wirewound 47uH 20% 100KHz 22Q-Factor Ferrite 2.6A 86mOhm DCR T/R", Case/Package=1260, Current Rating=2.6A, DC Resistance (DCR)=86mR, Frequency=7.63MHz, Inductance=47uH, Inductance Tolerance=20%, Manufacturer=Bourns, Max Operating Temperature=125°C, Min Operating Temperature=-40°C, Package Quantity=600, Resistance=86MR, Resistor Type=Wirewound, Saturation Current=2.5A, Supplier Part Number 1=652-SRR1260-470M, Test Frequency=100kHz, Category="Fixed Inductors", ComponentLink1Description=https://datasheet.ciiva.com/11799/0900766b80defded-11799944.pdf?src-supplier=RSComponents, ComponentLink1URL=https://datasheet.ciiva.com/11799/0900766b80defded-11799944.pdf?src-supplier=RSComponents, ComponentLink2Description=https://datasheet.ciiva.com/1062/srr1260-1062578.pdf?src-supplier=Digi-Key, ComponentLink2URL=https://datasheet.ciiva.com/1062/srr1260-1062578.pdf?src-supplier=Digi-Key, ComponentLink3Description=https://datasheet.ciiva.com/1062/srr1260-1062579.pdf?src-supplier=Digi-Key, ComponentLink3URL=https://datasheet.ciiva.com/1062/srr1260-1062579.pdf?src-supplier=Digi-Key, ComponentLink4Description=https://datasheet.ciiva.com/1062/srr1260-1062580.pdf?src-supplier=Digi-Key, ComponentLink4URL=https://datasheet.ciiva.com/1062/srr1260-1062580.pdf?src-supplier=Digi-Key, ComponentLink5Description=https://datasheet.ciiva.com/8517/srr1260-8517158.pdf?src-supplier=Avnet, ComponentLink5URL=https://datasheet.ciiva.com/8517/srr1260-8517158.pdf?src-supplier=Avnet, ComponentLink6Description=https://datasheet.ciiva.com/17111/70277056-17111735.pdf?src-supplier=Allied+Electronics, ComponentLink6URL=https://datasheet.ciiva.com/17111/70277056-17111735.pdf?src-supplier=Allied+Electronics, ComponentLink7Description=https://datasheet.ciiva.com/46384/1430852-46384136.pdf?src-supplier=Element14, ComponentLink7URL=https://datasheet.ciiva.com/46384/1430852-46384136.pdf?src-supplier=Element14, ComponentLink8Description=https://datasheet.ciiva.com/6161/1430852-6161177.pdf?src-supplier=Farnell, ComponentLink8URL=https://datasheet.ciiva.com/6161/1430852-6161177.pdf?src-supplier=Farnell, ComponentLink9Description=https://datasheet.ciiva.com/7849/1430852-7849786.pdf?src-supplier=Element14, ComponentLink9URL=https://datasheet.ciiva.com/7849/1430852-7849786.pdf?src-supplier=Element14, ComponentLink10Description=https://datasheet.ciiva.com/48684/srr1260-48684894.pdf?src-supplier=Avnet, ComponentLink10URL=https://datasheet.ciiva.com/48684/srr1260-48684894.pdf?src-supplier=Avnet, ComponentLink11Description=https://datasheet.ciiva.com/7307/1914016-7307759.pdf?src-supplier=Newark, ComponentLink11URL=https://datasheet.ciiva.com/7307/1914016-7307759.pdf?src-supplier=Newark, ComponentLink12Description=https://datasheet.ciiva.com/48690/001056651-da-01-en-mag-abge-l-ind-srr1260-470m-47uh-2-6a-48690779.pdf?src-supplier=Conrad, ComponentLink12URL=https://datasheet.ciiva.com/48690/001056651-da-01-en-mag-abge-l-ind-srr1260-470m-47uh-2-6a-48690779.pdf?src-supplier=Conrad, Core Material=Ferrite, DC Current=2.6A, Depth=12.8mm, Height=6mm, Height - Seated (Max)=0.256inch, Length=12.5mm, Manufacturer Part Number=SRR1260-470M, Material=Steel, Max DC Current=2.6A, Military Standard=Not, Mount="Surface Mount", Packaging="Tape and Reel", Pricing 1="1=1,36000, 10=1,02000, 50=1,02000, 100=0,91300, 1000=0,69900, 10000=0,52900 (USD)", Q Factor=22, Radiation Hardening=No, REACH SVHC="No SVHC", RMS Current (Irms)=2.6A, RoHS=Yes, RoHS Compliant=Yes, Sample Rate (Hz)=100kHz, Self Resonant Frequency=7.63MHz, Series=SRR1260, Shielding=Shielded, Stock 1=4692, Supplier 1=Mouser, Termination=SMD/SMT, Tolerance=20%, Width=12.5mm
P1 P2: "Conn Unshrouded Header HDR 16 POS 2.54mm Solder ST Thru-Hole Bulk", Color=Black, Manufacturer=Samtec, Max Current Rating=7.6A, Max Operating Temperature=105°C, Max Voltage Rating (AC)=550V, Min Operating Temperature=-55°C, Package Quantity=1, Supplier Part Number 1=200-TSW10807TD, Category=Connectors, ComponentLink1Description=https://datasheet.ciiva.com/6886/tsw-xxx-xx-xxx-x-xx-xxx-mkt-6886341.pdf?src-supplier=Digi-Key, ComponentLink1URL=https://datasheet.ciiva.com/6886/tsw-xxx-xx-xxx-x-xx-xxx-mkt-6886341.pdf?src-supplier=Digi-Key, ComponentLink2Description=https://datasheet.ciiva.com/10267/htsw-th-10267287.pdf?src-supplier=Avnet, ComponentLink2URL=https://datasheet.ciiva.com/10267/htsw-th-10267287.pdf?src-supplier=Avnet, ComponentLink3Description=https://datasheet.ciiva.com/10265/htsw-th-10265257.pdf?src-supplier=Avnet, ComponentLink3URL=https://datasheet.ciiva.com/10265/htsw-th-10265257.pdf?src-supplier=Avnet, Connector Type="Male Pin", Contact Material=Bronze, Contact Mating Length=0.23inch, Contact Plating=Tin, Depth=5.08mm, Gender=Male, Housing Color=Black, Housing Material=Polyester, Lead Free="Lead Free", Length=20.32mm, Manufacturer Part Number=TSW-108-07-T-D, Mount="Through Hole", Number of Contacts=16, Number of Positions=16, Number of Rows=2, Orientation=Straight, Packaging=Bulk, Pitch=2.54mm, Pricing 1="1=1,38000, 10=1,24000, 50=1,24000, 100=1,07000, 500=0,89200, 1000=0,76400, 2500=0,70700, 5000=0,67800, 10000=0,66200, 25000=0,64700 (USD)", Radiation Hardening=No, REACH SVHC="No SVHC", RoHS=Yes, Row Spacing=0.1inch, Stock 1=9900, Supplier 1=Mouser, Termination=Solder, Width=5.08mm
R1: "Res Thick Film 0805 169K Ohm 1% 1/8W ±100ppm/°C Molded SMD Punched Carrier T/R", Case Code (Imperial)=0805, Case Code (Metric)=2012, Manufacturer=Panasonic, Max Operating Temperature=155°C, Max Power Dissipation=125mW, Min Operating Temperature=-55°C, Package Quantity=1, Resistance=169kR, Resistance Tolerance=1%, Resistor Type="Thick Film", Supplier Part Number 1=667-ERJ-6ENF1693V, Temperature Coefficient=100ppm/°C, Voltage Rating=150V, Case/Package=0805, Category="Chip SMD Resistors", ComponentLink1Description=https://datasheet.ciiva.com/16759/70260748-16759800.pdf?src-supplier=Allied+Electronics, ComponentLink1URL=https://datasheet.ciiva.com/16759/70260748-16759800.pdf?src-supplier=Allied+Electronics, ComponentLink2Description=https://datasheet.ciiva.com/22672/1678782-22672876.pdf?src-supplier=Element14, ComponentLink2URL=https://datasheet.ciiva.com/22672/1678782-22672876.pdf?src-supplier=Element14, ComponentLink3Description=https://datasheet.ciiva.com/16764/70260748-16764845.pdf?src-supplier=Allied+Electronics, ComponentLink3URL=https://datasheet.ciiva.com/16764/70260748-16764845.pdf?src-supplier=Allied+Electronics, ComponentLink4Description=https://datasheet.ciiva.com/46373/1678782-46373037.pdf?src-supplier=Element14, ComponentLink4URL=https://datasheet.ciiva.com/46373/1678782-46373037.pdf?src-supplier=Element14, ComponentLink5Description=https://datasheet.ciiva.com/46373/1678782-46373038.pdf?src-supplier=Element14, ComponentLink5URL=https://datasheet.ciiva.com/46373/1678782-46373038.pdf?src-supplier=Element14, Construction=Rectangular, Contact Plating=Tin, Depth=1.25mm, Features="Automotive AEC-Q200", Height=0.6mm, Lead Free="Lead Free", Length=2mm, Manufacturer Part Number=ERJ-6ENF1693V, Military Standard=Not, Mount="Surface Mount", Number of Terminations=2, Packaging="Tape and Reel", Power Rating=125mW, Pricing 1="1=0,10000, 10=0,06400, 50=0,06400, 100=0,03100, 1000=0,01700, 10000=0,01100 (USD)", Radiation Hardening=No, REACH SVHC="No SVHC", RoHS=Yes, RoHS Compliant=Yes, Series=ERJ, Stock 1=26412, Supplier 1=Mouser, Technology="THICK FILM", Termination=Solder, Tolerance=1%, Voltage Rating (DC)=150V, Width=1.2mm
R2: "Res Thick Film 0805 35.7K Ohm 1% 1/8W 100ppm/C Molded SMD SMD Paper Tape on Plastic Reel", Case Code (Imperial)=0805, Case Code (Metric)=2012, Manufacturer=Bourns, Max Operating Temperature=155°C, Max Power Dissipation=125mW, Min Operating Temperature=-55°C, Package Quantity=5000, Resistance=35.7kR, Resistor Type="Thick Film", Supplier Part Number 1=652-CR0805FX-3572ELF, Temperature Coefficient=100ppm/°C, Tolerance=1%, Voltage Rating=150V, Case/Package=0805, Category="Chip SMD Resistors", ComponentLink1Description=https://datasheet.ciiva.com/14985/chpreztr-14985829.pdf?src-supplier=Digi-Key, ComponentLink1URL=https://datasheet.ciiva.com/14985/chpreztr-14985829.pdf?src-supplier=Digi-Key, ComponentLink2Description=https://datasheet.ciiva.com/5543/chpreztr-5543310.pdf?src-supplier=Mouser, ComponentLink2URL=https://datasheet.ciiva.com/5543/chpreztr-5543310.pdf?src-supplier=Mouser, ComponentLink3Description=https://datasheet.ciiva.com/9121/chpreztr-9121519.pdf?src-supplier=Avnet, ComponentLink3URL=https://datasheet.ciiva.com/9121/chpreztr-9121519.pdf?src-supplier=Avnet, Contact Plating=Tin, Features="Moisture Resistant", Height=0.024inch, Length=0.079inch, Manufacturer Part Number=CR0805-FX-3572ELF, Mount="Surface Mount", Number of Terminations=2, Packaging="Tape and Reel", Power Rating=125mW, Pricing 1="1=0,10000, 10=0,05000, 50=0,05000, 100=0,02100, 1000=0,01000, 10000=0,00500 (USD)", Radiation Hardening=No, RoHS=Yes, RoHS Compliant=Yes, Series=CR0805, Stock 1=40799, Supplier 1=Mouser, Termination=SMD/SMT, Thickness=508um, Width=0.049inch
R4: "Res Thick Film 0805 22.1K Ohm 1% 1/8W ±100ppm/°C Molded SMD SMD Paper Tape on Plastic Reel", Case Code (Imperial)=0805, Case Code (Metric)=2012, Manufacturer=Bourns, Max Operating Temperature=155°C, Max Power Dissipation=125mW, Min Operating Temperature=-55°C, Package Quantity=5000, Resistance=22.1kR, Resistor Type="Thick Film", Supplier Part Number 1=652-CR0805FX-2212ELF, Temperature Coefficient=100ppm/°C, Tolerance=1%, Voltage Rating=150V, Case/Package=0805, Category="Chip SMD Resistors", ComponentLink1Description=https://datasheet.ciiva.com/18608/chpreztr-18608486.pdf?src-supplier=Digi-Key, ComponentLink1URL=https://datasheet.ciiva.com/18608/chpreztr-18608486.pdf?src-supplier=Digi-Key, ComponentLink2Description=https://datasheet.ciiva.com/18608/chpreztr-18608487.pdf?src-supplier=Digi-Key, ComponentLink2URL=https://datasheet.ciiva.com/18608/chpreztr-18608487.pdf?src-supplier=Digi-Key, ComponentLink3Description=https://datasheet.ciiva.com/18608/chpreztr-18608488.pdf?src-supplier=Digi-Key, ComponentLink3URL=https://datasheet.ciiva.com/18608/chpreztr-18608488.pdf?src-supplier=Digi-Key, ComponentLink4Description=https://datasheet.ciiva.com/3205/chpreztr-3205695.pdf?src-supplier=Avnet, ComponentLink4URL=https://datasheet.ciiva.com/3205/chpreztr-3205695.pdf?src-supplier=Avnet, Construction=Rectangular, Contact Plating=Tin, Depth=1.25mm, Features="Moisture Resistant", Height=0.024inch, Length=2mm, Manufacturer Part Number=CR0805-FX-2212ELF, Military Standard=Not, Mount="Surface Mount", Number of Terminations=2, Packaging="Tape and Reel", Power Rating=125mW, Pricing 1="1=0,10000, 10=0,02700, 50=0,02700, 100=0,01100, 1000=0,00500, 10000=0,00500 (USD)", Radiation Hardening=No, RoHS=Yes, RoHS Compliant=Yes, Series=CR0805, Stock 1=28517, Supplier 1=Mouser, Termination=SMD/SMT, Thickness=508um, Width=1.25mm
R5: "Res Thick Film 0805 10.2K Ohm 1% 1/8W ±100ppm/°C Molded SMD SMD Paper Tape on Plastic Reel", Case Code (Imperial)=0805, Case Code (Metric)=2012, Manufacturer=Bourns, Max Operating Temperature=155°C, Max Power Dissipation=125mW, Min Operating Temperature=-55°C, Package Quantity=5000, Resistance=10.2kR, Resistor Type="Thick Film", Supplier Part Number 1=652-CR0805FX-1022ELF, Temperature Coefficient=100ppm/°C, Tolerance=1%, Voltage Rating=150V, Case/Package=0805, Category="Chip SMD Resistors", ComponentLink1Description=https://datasheet.ciiva.com/14986/chpreztr-14986043.pdf?src-supplier=Digi-Key, ComponentLink1URL=https://datasheet.ciiva.com/14986/chpreztr-14986043.pdf?src-supplier=Digi-Key, ComponentLink2Description=https://datasheet.ciiva.com/9122/chpreztr-9122286.pdf?src-supplier=Avnet, ComponentLink2URL=https://datasheet.ciiva.com/9122/chpreztr-9122286.pdf?src-supplier=Avnet, Construction=Rectangular, Contact Plating=Tin, Depth=1.25mm, Features="Moisture Resistant", Height=0.024inch, Length=2mm, Manufacturer Part Number=CR0805-FX-1022ELF, Military Standard=Not, Mount="Surface Mount", Number of Terminations=2, Packaging="Tape and Reel", Power Rating=125mW, Pricing 1="1=0,10000, 10=0,05000, 50=0,05000, 100=0,02100, 1000=0,01000, 10000=0,00500 (USD)", Radiation Hardening=No, RoHS=Yes, RoHS Compliant=Yes, Series=CR0805, Stock 1=45271, Supplier 1=Mouser, Termination=SMD/SMT, Thickness=508um, Width=0.049inch
R6: "Res Thick Film 0805 1.96K Ohm 1% 1/8W ±100ppm/°C Molded SMD SMD Paper T/R", Case Code (Imperial)=0805, Case Code (Metric)=2012, Manufacturer=Vishay, Max Operating Temperature=155°C, Max Power Dissipation=125mW, Min Operating Temperature=-55°C, Package Quantity=10, Resistance=1.96kR, Resistance Tolerance=1%, Resistor Type="Thick Film", Supplier Part Number 1=71-CRCW08051K96FKEA, Temperature Coefficient=100ppm/°C, Voltage Rating=150V, Case/Package=0805, Category="Chip SMD Resistors", ComponentLink1Description=https://datasheet.ciiva.com/11810/0900766b80d98b26-11810985.pdf?src-supplier=RSComponents, ComponentLink1URL=https://datasheet.ciiva.com/11810/0900766b80d98b26-11810985.pdf?src-supplier=RSComponents, ComponentLink2Description=https://datasheet.ciiva.com/7670/1697337-7670278.pdf?src-supplier=Element14, ComponentLink2URL=https://datasheet.ciiva.com/7670/1697337-7670278.pdf?src-supplier=Element14, ComponentLink3Description=https://datasheet.ciiva.com/16211/dcrcwe3-16211959.pdf?src-supplier=Future+Electronics, ComponentLink3URL=https://datasheet.ciiva.com/16211/dcrcwe3-16211959.pdf?src-supplier=Future+Electronics, ComponentLink4Description=https://datasheet.ciiva.com/2496/dcrcwe3-2496058.pdf?src-supplier=Digi-Key, ComponentLink4URL=https://datasheet.ciiva.com/2496/dcrcwe3-2496058.pdf?src-supplier=Digi-Key, ComponentLink5Description=https://datasheet.ciiva.com/2496/dcrcwe3-2496059.pdf?src-supplier=Digi-Key, ComponentLink5URL=https://datasheet.ciiva.com/2496/dcrcwe3-2496059.pdf?src-supplier=Digi-Key, ComponentLink6Description=https://datasheet.ciiva.com/2496/dcrcwe3-2496060.pdf?src-supplier=Digi-Key, ComponentLink6URL=https://datasheet.ciiva.com/2496/dcrcwe3-2496060.pdf?src-supplier=Digi-Key, Construction=Rectangular, Contact Plating=Tin, Depth=1.25mm, Features="Automotive AEC-Q200", Height=0.45mm, Lead Free="Lead Free", Length=2mm, Manufacturer Part Number=CRCW08051K96FKEA, Military Standard=Not, Number of Pins=2, Number of Terminations=2, Packaging="Tape and Reel", Power Rating=125mW, Pricing 1="1=0,18000, 10=0,06500, 50=0,06500, 100=0,02700, 1000=0,01300, 10000=0,00900 (USD)", Radiation Hardening=No, REACH SVHC=Unknown, RoHS=Yes, RoHS Compliant=Yes, Series=CRCW, Size Code=0805, Stock 1=18581, Supplier 1=Mouser, Technology="THICK FILM", Termination=SMD/SMT, Tolerance=1%, Voltage Rating (DC)=150V, Weight=0.000194oz, Width=1.25mm
U1: "3.5 to 28V Input, 2A, 300kHz Step-Down Converter with Eco-mode 8-SOIC -40 to 150", Case/Package=D, Manufacturer="Texas Instruments", Max Input Voltage=28V, Max Operating Temperature=150°C, Max Output Current=2A, Max Output Voltage=25V, Min Input Voltage=3.5V, Min Operating Temperature=-40°C, Min Output Voltage=800mV, Package Quantity=75, Quiescent Current=110uA, Supplier Part Number 1=595-TPS54233D, Switching Frequency=300kHz, Category="Voltage Regulators - Switching", ComponentLink1Description=https://datasheet.ciiva.com/2035/tps54233-2035392.pdf?src-supplier=Digi-Key, ComponentLink1URL=https://datasheet.ciiva.com/2035/tps54233-2035392.pdf?src-supplier=Digi-Key, ComponentLink2Description=https://datasheet.ciiva.com/4118/47079537s8453800n7713-4118932.pdf?src-supplier=Arrow+Electronics, ComponentLink2URL=https://datasheet.ciiva.com/4118/47079537s8453800n7713-4118932.pdf?src-supplier=Arrow+Electronics, Contact Plating=Gold, Height=1.58mm, Lead Free="Lead Free", Length=4.9mm, Manufacturer Part Number=TPS54233D, Number of Outputs=1, Number of Pins=8, Operating Supply Voltage=28V, Output Configuration=Positive, Output Current=2A, Output Type=Adjustable, Output Voltage=25V, Packaging=Rail/Tube, Pricing 1="1=2,13000, 10=1,92000, 25=1,81000, 50=1,81000, 100=1,54000, 250=1,44000, 375=1,26000, 1000=1,26000, 1125=1,05000, 10000=1,05000 (USD)", Radiation Hardening=No, REACH SVHC="No SVHC", RoHS=Yes, RoHS Compliant=Yes, Series="SWIFT™, Eco-Mode™", Stock 1=4197, Supplier 1=Mouser, Synchronous Rectifier=No, Weight=0.002561oz, Width=3.91mm

## Free pads (board coordinates)
  round 2.75 hole 2.75 unplated: MH3(3.1,1.4) MH3(3.1,29.8) MH3(37.9,1.4) MH3(37.9,29.8)

## Via types
v1: diameter 0.6, hole 0.3, Top Layer to Bottom Layer, 25 vias

## Nets (pads, with @x,y where several pads share a name; then routed paths per layer and width w, separated by ;. In a path a pad name is that pad's centre, name@x,y a point inside that pad or via, vN(x,y) a via of type N, cw(c..) or ccw(c..) an arc to the next point about the centre after c; other vN are vias at no path point)
3V3: P1.04
3V3_P2: P2.04
5V: P1.03
5V_P2: P2.03
5VEXT: C7.1 C8.1 C9.1 L1.2 P1.01 P2.01 R5.1 | length 34.1
  Top Layer w0.5: v1(11.3,6.2) 11.3,6.227 11.4,6.327 R5.1
  Bottom Layer w0.5: C7.1 C8.1 C9.1 26.901,5.899 L1.2 37.96,5.3 P2.01
24V: C1.1 C2.1 J1.1 R1.1 U1.2
GND: C1.2 C2.2 C3.2 C4.2 C5.2 C7.2 C8.2 C9.2 D1.2 J1.2 P1.02 P2.02 R2.2 R6.2 U1.7 | length 0.1
  Top Layer w0.5: C4.2 C4.2@19.901,9.437
  other v1: 20.9,14.8 15.5,17.1 16.9,17.1 19,18.2 20.5,18.2 22,18.2 24.8,18.6 27.2,18.6 15.5,18.7 16.9,18.7 19,19.5 20.5,19.5 22,19.5 24.8,20.7 27.2,20.7
GPIO2: P2.05
GPIO4: P2.07
GPIO12: P1.06
GPIO13: P1.05
GPIO14: P1.07
GPIO15: P2.06
GPIO16: P2.10
GPIO17: P2.09
GPIO21: P2.13
GPIO22: P2.16
GPIO25: P1.10
GPIO26: P1.09
GPIO27: P1.08
GPIO32: P1.12
GPIO33: P1.11
GPIO34: P1.14
GPIO35: P1.13
GPIO36: P1.16
GPIO39: P1.15
IO0: P2.08
NetC3_1: C3.1 R4.1 U1.6 | length 7.3
  Top Layer w0.5: R4.1 15.85,12.1 17.799,12.1 C3.1 18.602,12.902 18.602,14.002 19.84,15.24 19.84,16.25 U1.6
NetC4_1: C4.1 R4.2 | length 2.8
  Top Layer w0.5: R4.2 15.85,9.7 17.836,9.7 C4.1
NetC5_1: C5.1 U1.4 | length 3.2
  Top Layer w0.5: v1(17.6,21.5) 17.625,21.525 U1.4
  Bottom Layer w0.5: C5.1 17.403,22.898 17.403,21.724 17.6,21.527 v1(17.6,21.5)
NetC6_1: C6.1 D1.1 L1.1 U1.8
  other v1: 22.9,12.1 24.1,12.1 22.9,13.4 24.1,13.4 22.9,14.8 24.1,14.8
NetC6_2: C6.2 U1.1 | length 8.4
  Top Layer w0.5: U1.1 22.405,21.875 22.43,21.9 23.6,21.9 v1(23.8,21.7) ; v1(23.6,16.8) 23.8,16.6 C6.2
  Bottom Layer w0.5: v1(23.6,16.8) 23.6,21.473 23.8,21.673 v1(23.8,21.7)
NetR1_2: R1.2 R2.1 U1.3 | length 6
  Top Layer w0.5: R2.1 R1.2@16.2,23.025 ; R1.2 18.415,23.325 19.865,21.875 U1.3
NetR5_2: R5.2 R6.1 U1.5 | length 10
  Top Layer w0.5: R5.2 13.65,11.85 15.257,13.457 15.257,14.1 15.432,14.275 17.575,14.275 18.57,15.27 18.57,16.25 U1.5
SPI_CLK: P2.11
SPI_CS: P2.12
SPI_MISO: P2.14
SPI_MOSI: P2.15

## Polygon pours and split planes (outlines as drawn)
GND on Top Layer "GND_L01_P011" (solid, remove dead copper, pour order 11): 38.8,32.8 40.4,31.2 40.4,0.4 38.9,-1.1 2.2,-1.1 0.5,0.6 0.5,31.2 2.1,32.8
NetC6_1 on Top Layer "NETC6_1_L01_P005" (solid, pour order 5): 28.1,17.6 29.5,16.2 29.5,15.1 29.8,14.8 32.5,14.8 33.8,13.5 33.8,8.2 21.1,8.2 21.1,13.6 22,14.5 22,17 22.8,17 22.8,16.5 23.9,15.4 26.2,15.4 26.2,17.6
24V on Top Layer "24V_L01_P001" (solid, pour order 1): 20.6,20.7 21.7,20.7 21.7,22.5 27,22.5 27,32.6 10.4,32.6 10.4,22.3 15,22.3 15,24 19.1,24 19.1,23.8 20.6,22.3
GND on Bottom Layer "GND_L02_P012" (solid, remove dead copper, pour order 12): 38.8,32.8 40.4,31.2 40.4,0.4 38.9,-1.1 2.2,-1.1 0.5,0.6 0.5,31.2 2.1,32.8
5VEXT on Bottom Layer "5VEXT_L02_P010" (solid, pour order 10): 6.9,7.6 7.6,6.9 33.4,6.9 34.7,5.6 37.8,5.6 37.9,5.7 37.9,7.4 38.3,7.8 40.6,7.8 40.6,4.5 36.4,4.5 35.1,3.2 6.3,3.2 4.6,4.9 3.8,4.9 3.1,5.6 3.1,7.1 3.6,7.6 3.8,7.6
NetC6_1 on Bottom Layer "NETC6_1_L02_P009" (solid, pour order 9): 24.8,16.5 24.8,16 22,16 22,8.3 33.8,8.3 33.8,16.5

## Silkscreen, mask and mechanical layers (free items; w line width, h text height)
Top Overlay:
  lines w0.2: 19.3,31.9 19.8,32.4 ; 19.8,30.8 19.8,32.4 ; 20.3,31.9 19.8,32.4
  text "TOP" at 17.934,28.854 h1.4
  text "JLCJLCJLCJLC" at 34.1,19.6 h1 r90
  text "Smart IoT Wallswitch / 24VDC to 5VDC converter / BOTTOM module" at 4.149,-1.2 h1.2
Bottom Overlay:
  text "24VDC" at 33.246,30.046 h1.5 r90
  text "+   -" at 22.354,21.446 h1.5 r180
Mechanical 4:
  circle w0.127: c37.9,29.8 r3
  circle w0.127: c37.9,1.4 r3
  circle w0.127: c3.1,1.4 r3
  circle w0.127: c3.1,29.8 r3
Board Outline:
  the board outline again, w0.1
Dimensions:
  circle w0.254: c20.5,13.9 r29
  circle w0.254: c20.5,13.9 r37
  lines w0.254: -9.5,-16.1 -9.5,53.9 ; -4,-16.1 -4,43.9 ; 45,-16.1 45,43.9 ; 50.5,-16.1 50.5,53.9 ; 0,31.4 3,34.4 38,34.4 41,31.4 ; 0,31.4 1.8,33.2 39.2,33.2 41,31.4 ; 0,31.4 0,0 1.8,-1.8 39.2,-1.8 41,0 41,31.4 ; 0,31.4 0,-3.6 3,-6.6 38,-6.6 41,-3.6 41,31.4 ; -19.5,-26.1 60.5,-26.1 60.5,53.9 -19.5,53.9 -19.5,-26.1 ; -14.5,-6.1 55.5,-6.1 55.5,33.9 -14.5,33.9 -14.5,-6.1

## Dimensions
39.2,33.2 to 39.2,-1.8 on Dimensions
0,31.4 to 41,31.4 on Dimensions
-9.5,53.9 to 50.5,53.9 on Dimensions
-19.5,53.9 to 60.5,53.9 on Dimensions
-19.5,-26.1 to -19.5,53.9 on Dimensions
57.5,13.9 to 51.8,31.6 on Dimensions